# EAGLE board CT_schematic (EAGLE 7.6.0)

Size 100 x 80 mm. Coordinates in mm from the lower left corner, seen from the top.
Outline: 0,0 100,0 100,80 0,80 0,0
Copper layers (1*16): Top 0.035mm / dielectric 1.5mm / Bottom 0.035mm
Design rules "default": minimum track width 10mil, minimum drill 24mil, track to track 8mil, track to pad 8mil, pad to pad 8mil, via to via 8mil, smd to smd 8mil, copper to edge 40mil, drill to drill 8mil, minimum pad ring 10mil, minimum via ring 8mil, stop-mask expansion 4mil, vias tented up to drill 0mil, thermal gap 10mil

## Footprints (pad centres in the part's own frame; a part is rotated, then mirrored left to right if it is on the bottom)
C0603 = smd 0.8 x 0.8: 1 -0.762,0; 2 0.762,0
C0402 = smd 0.5 x 0.5: 1 -0.508,0; 2 0.508,0
C1210 = smd 1.2 x 2.5: 1 -1.524,0; 2 1.524,0
EXV-9H = smd 3.505 x 1.676: 1 -2.857,0; 2 2.857,0
L0603 = smd 0.8 x 0.8: 1 -0.762,0; 2 0.762,0
PJ-037B_PACKAGE = drill 3.7 square: 1 12,0 | drill 3.2 square: 2 6,0
R0603 = smd 0.8 x 0.8: 1 -0.762,0; 2 0.762,0
WLCSP104 = smd 0.229 x 0.229: A1 -1.6,2.2; A2 -1.2,2.2; A3 -0.8,2.2; A4 -0.4,2.2; A5 0,2.2; A6 0.4,2.2; A7 0.8,2.2; A8 1.2,2.2; A9 1.6,2.2; B1 -1.6,1.8; B2 -1.2,1.8; B3 -0.8,1.8; B4 -0.4,1.8; B5 0,1.8; B6 0.4,1.8; B7 0.8,1.8; B8 1.2,1.8; B9 1.6,1.8; C1 -1.6,1.4; C2 -1.2,1.4; C3 -0.8,1.4; C4 -0.4,1.4; C5 0,1.4; C6 0.4,1.4; C7 0.8,1.4; C8 1.2,1.4; C9 1.6,1.4; D1 -1.6,1; D2 -1.2,1; D3 -0.8,1; D4 -0.4,1; D5 0,1; D6 0.4,1; D7 0.8,1; D8 1.2,1; D9 1.6,1; E1 -1.6,0.6; E2 -1.2,0.6; E3 -0.8,0.6; E4 -0.4,0.6; E6 0.4,0.6; E7 0.8,0.6; E8 1.2,0.6; E9 1.6,0.6; F1 -1.6,0.2; F2 -1.2,0.2; F3 -0.8,0.2; F4 -0.4,0.2; F6 0.4,0.2; F7 0.8,0.2; F8 1.2,0.2; F9 1.6,0.2; G1 -1.6,-0.2; G2 -1.2,-0.2; G3 -0.8,-0.2; G4 -0.4,-0.2; G6 0.4,-0.2; G7 0.8,-0.2; G8 1.2,-0.2; G9 1.6,-0.2; H1 -1.6,-0.6; H2 -1.2,-0.6; H3 -0.8,-0.6; H4 -0.4,-0.6; H6 0.4,-0.6; H7 0.8,-0.6; H8 1.2,-0.6; H9 1.6,-0.6; J1 -1.6,-1; J2 -1.2,-1; J3 -0.8,-1; J4 -0.4,-1; J5 0,-1; J6 0.4,-1; J7 0.8,-1; J8 1.2,-1; J9 1.6,-1; K1 -1.6,-1.4; K2 -1.2,-1.4; K3 -0.8,-1.4; K4 -0.4,-1.4; K5 0,-1.4; K6 0.4,-1.4; K7 0.8,-1.4; K8 1.2,-1.4; K9 1.6,-1.4; L1 -1.6,-1.8; L2 -1.2,-1.8; L3 -0.8,-1.8; L4 -0.4,-1.8; L5 0,-1.8; L6 0.4,-1.8; L7 0.8,-1.8; L8 1.2,-1.8; L9 1.6,-1.8; M1 -1.6,-2.2; M2 -1.2,-2.2; M3 -0.8,-2.2; M4 -0.4,-2.2; M5 0,-2.2; M6 0.4,-2.2; M7 0.8,-2.2; M8 1.2,-2.2; M9 1.6,-2.2
SOIC-8 = smd 1.6 x 0.6: 1 -2.7,1.905 | smd 1.55 x 0.6: 2 -2.7,0.635; 3 -2.7,-0.635; 4 -2.7,-1.905; 5 2.7,-1.905; 6 2.7,-0.635; 7 2.7,0.635; 8 2.7,1.905
TDFN-8/6MM = smd 0.3 x 0.75: 1 0,0; 2 0.5,0; 3 1,0; 4 1.5,0; 5 1.5,3; 6 1,3; 7 0.5,3; 8 0,3
SSOP-28 = smd 1.5 x 0.4: 1 -3.625,4.225; 2 -3.625,3.575; 3 -3.625,2.925; 4 -3.625,2.275; 5 -3.625,1.625; 6 -3.625,0.975; 7 -3.625,0.325; 8 -3.625,-0.325; 9 -3.625,-0.975; 10 -3.625,-1.625; 11 -3.625,-2.275; 12 -3.625,-2.925; 13 -3.625,-3.575; 14 -3.625,-4.225; 15 3.625,-4.225; 16 3.625,-3.575; 17 3.625,-2.925; 18 3.625,-2.275; 19 3.625,-1.625; 20 3.625,-0.975; 21 3.625,-0.325; 22 3.625,0.325; 23 3.625,0.975; 24 3.625,1.625; 25 3.625,2.275; 26 3.625,2.925; 27 3.625,3.575; 28 3.625,4.225
182-009-MALE = drill 1.194 pad 1.524 octagon: 1 -5.537,10.923; 2 -2.769,10.923; 3 0,10.923; 4 2.769,10.923; 5 5.537,10.923; 6 -4.153,8.08; 7 -1.384,8.08; 8 1.384,8.08; 9 4.153,8.08 | hole 3.048: -12.446,9.501; 12.446,9.501
USB-A-H = drill 0.914: 1 2.718,3.493; 2 2.718,1.003; 3 2.718,-1.003; 4 2.718,-3.493 | drill 2.311: 5 0,-6.566; 6 0,6.566
SOT143B = smd 1 x 0.7: 1 -0.75,-1 | smd 0.6 x 0.7: 2 0.95,-1; 3 0.95,1; 4 -0.95,1
ABLS-25.000MHZ-B2F-T = smd 5.6 x 2.8: 1 -3.81,0; 2 5.69,0
ASEK = smd 1.4 x 1: 1 -1.1,-0.8; 2 1.1,-0.8; 3 1.1,0.8; 4 -1.1,0.8
WSON-8 = smd 0.3 x 0.6: 1 -0.75,0; 2 0.05,0; 3 0.85,0; 4 1.65,0; 5 1.65,3.8; 6 0.85,3.8; 7 0.05,3.8; 8 -0.75,3.8 | smd 3 x 2.6: PAD 0.45,1.9
SON-6 = smd 0.55 x 0.3: 1 -0.355,0.5 | smd 0.52 x 0.3: 2 -0.37,0; 3 -0.37,-0.5; 4 0.37,-0.5; 5 0.37,0; 6 0.37,0.5
SW_4-1437565-2 = smd 1.4 x 2.1: 1 -2.23,4.55; 2 -2.23,-4.55; 3 2.23,4.55; 4 2.23,-4.55
LGM67K-G1J2-24-Z = smd 0.8 x 1.4: A -2,0; C 0,0
NC7SZ125M5X = smd 1.3 x 0.7: 1 -1.3,0.95; 2 -1.3,0; 3 -1.3,-0.95; 4 1.3,-0.95; 5 1.3,0.95

## Placement (x,y rotation side)
C1  1e-07  [C0603]  -53.34,66.04 0 top  (outside the outline)
C2  1e-07  [C0603]  -57.15,66.04 0 top  (outside the outline)
C3  1e-07  [C0603]  -60.96,66.04 0 top  (outside the outline)
C4  1e-07  [C0603]  -64.77,66.04 0 top  (outside the outline)
C5  1e-07  [C0603]  -68.58,66.04 0 top  (outside the outline)
C6  1e-07  [C0603]  -72.39,66.04 0 top  (outside the outline)
C7  1e-07  [C0603]  -15.24,71.12 0 top  (outside the outline)
C8  4.7e-06  [C0603]  -49.53,66.04 0 top  (outside the outline)
C9  1e-07  [C0603]  -19.05,71.12 0 top  (outside the outline)
C10  1e-08  [C0603]  -22.86,71.12 0 top  (outside the outline)
C11  1e-06  [C0603]  -26.67,71.12 0 top  (outside the outline)
C12  1e-11  [C0402]  -60.96,71.12 0 top  (outside the outline)
C13  1e-11  [C0402]  -64.77,71.12 0 top  (outside the outline)
C14  1e-08  [C0402]  -68.58,71.12 0 top  (outside the outline)
C15  1e-08  [C0402]  -72.39,71.12 0 top  (outside the outline)
C16  1e-07  [C0402]  -15.24,76.2 0 top  (outside the outline)
C17  1e-07  [C0402]  -19.05,76.2 0 top  (outside the outline)
C18  1e-07  [C0402]  -22.86,76.2 0 top  (outside the outline)
C19  1e-07  [C0402]  -26.67,76.2 0 top  (outside the outline)
C20  1e-07  [C0402]  -30.48,76.2 0 top  (outside the outline)
C21  1e-08  [C0402]  -34.29,76.2 0 top  (outside the outline)
C22  1e-08  [C0402]  -38.1,76.2 0 top  (outside the outline)
C23  1e-05  [C1210]  -29.21,59.69 0 top  (outside the outline)
C24  1e-05  [C1210]  -35.56,59.69 0 top  (outside the outline)
C25  1e-07  [C0402]  -41.91,76.2 0 top  (outside the outline)
C26  0.0001  [EXV-9H]  -38.1,52.07 0 top  (outside the outline)
C27  0.0001  [EXV-9H]  -49.53,52.07 0 top  (outside the outline)
C28  1e-08  [C0402]  -45.72,76.2 0 top  (outside the outline)
F1  240.0  [L0603]  -30.48,71.12 0 top  (outside the outline)
J1  PJ-037B  [PJ-037B_PACKAGE]  -39.37,29.21 0 top  (outside the outline)
R2  1000.0  [R0603]  -34.29,71.12 0 top  (outside the outline)
R4  4700.0  [R0603]  -38.1,71.12 0 top  (outside the outline)
R5  2200.0  [R0603]  -41.91,71.12 0 top  (outside the outline)
R6  2200.0  [R0603]  -45.72,71.12 0 top  (outside the outline)
R7  10000.0  [R0603]  -67.31,58.42 0 top  (outside the outline)
R8  10000.0  [R0603]  -72.39,58.42 0 top  (outside the outline)
R9  10000.0  [R0603]  -15.24,66.04 0 top  (outside the outline)
R10  10000.0  [R0603]  -20.32,66.04 0 top  (outside the outline)
R11  10000.0  [R0603]  -25.4,66.04 0 top  (outside the outline)
R12  10000.0  [R0603]  -30.48,66.04 0 top  (outside the outline)
R13  10000.0  [R0603]  -35.56,66.04 0 top  (outside the outline)
R14  100000.0  [R0603]  -46.99,58.42 0 top  (outside the outline)
R15  100000.0  [R0603]  -52.07,58.42 0 top  (outside the outline)
R16  2231.0  [R0603]  -49.53,71.12 0 top  (outside the outline)
R17  1000.0  [R0603]  -53.34,71.12 0 top  (outside the outline)
R18  10000.0  [R0603]  -40.64,66.04 0 top  (outside the outline)
R19  10000.0  [R0603]  -45.72,66.04 0 top  (outside the outline)
R20  9100.0  [R0603]  -57.15,71.12 0 top  (outside the outline)
R21  680000.0  [R0603]  -57.15,58.42 0 top  (outside the outline)
R22  120000.0  [R0603]  -62.23,58.42 0 top  (outside the outline)
U1  STM32L151VEY6TR  [WLCSP104]  -52.07,41.91 0 top  (outside the outline)
U2  AT25020B-SSHL-T  [SOIC-8]  -24.13,43.18 0 top  (outside the outline)
U3  24AA64T-I/MNY  [TDFN-8/6MM]  -71.12,26.67 0 top  (outside the outline)
U4  ST3241EBPR  [SSOP-28]  -19.05,30.48 0 top  (outside the outline)
U5  182-009-113R531  [182-009-MALE]  -36.83,6.35 0 top  (outside the outline)
U6  61400416021  [USB-A-H]  -59.69,8.89 0 top  (outside the outline)
U7  prtr5v0u2ax  [SOT143B]  -58.42,76.2 0 top  (outside the outline)
U8  ABLS-25.000MHZ-B2F-T  [ABLS-25.000MHZ-B2F-T]  -68.58,52.07 0 top  (outside the outline)
U9  ASEK-32.768KHz-ECST  [ASEK]  -29.21,52.07 0 top  (outside the outline)
U10  LP3878SDX-ADJ/NOPB  [WSON-8]  -45.72,40.64 0 top  (outside the outline)
U11  TPS3895ADRYR  [SON-6]  -62.23,74.93 0 top  (outside the outline)
U12  4-1437565-2  [SW_4-1437565-2]  -55.88,27.94 0 top  (outside the outline)
U13  Q65110A2395  [LGM67K-G1J2-24-Z]  -17.78,59.69 0 top  (outside the outline)
U14  nc7sz125m5x  [NC7SZ125M5X]  -40.64,58.42 0 top  (outside the outline)

## Library data of the parts
C1-C28 F1 J1 R2 R4-R22 U1-U14 = circuit_tree

## Nets
CLK_CRYSTAL_U1_F8: C12.1 U1.F8 U8.1
CLK_CRYSTAL_U1_F9: C13.1 U1.F9 U8.2
CLK_U1_D8: U1.D8 U9.3
GND: C1.2 C2.2 C3.2 C4.2 C5.2 C6.2 C7.2 C8.2 C9.2 C10.2 C11.2 C12.2 C13.2 C14.2 C15.2 C16.2 C19.2 C20.2 C21.2 C22.2 C23.2 C24.2 C25.2 C26.2 C27.2 C28.2 J1.2 R2.2 R7.2 R17.2 R20.2 R22.2 U1.A1 U1.C7 U1.D2 U1.E8 U1.H8 U1.J9 U1.K8 U1.L2 U1.M1 U2.4 U3.4 U4.23 U4.25 U5.5 U6.4 U6.5 U6.6 U7.1 U9.2 U10.3 U10.PAD U11.2 U13.C U14.1 U14.3
NET_U1_A7: R7.1 U1.A7
NET_U1_B6: R6.1 U1.B6 U3.5
NET_U1_C5: R5.1 U1.C5 U3.6
NET_U1_E7: C9.1 U1.E7
NET_U1_F7: R4.1 U1.F7 U14.4
NET_U1_G6: C10.1 C11.1 F1.1 U1.G6 U1.G7
NET_U1_M7: U13.A
NET_U1_M8: U12.3 U12.4
NET_U2_3: R8.1 U2.3
NET_U2_7: R10.1 U2.7
NET_U3_1: R11.1 U3.1
NET_U3_2: R12.1 U3.2
NET_U3_3: R13.1 U3.3
NET_U4_1: C18.1 U4.1
NET_U4_2: C18.2 U4.2
NET_U4_3: C20.1 U4.3
NET_U4_22: R14.1 U4.22
NET_U4_24: C17.2 U4.24
NET_U4_27: C19.1 U4.27
NET_U4_28: C17.1 U4.28
NET_U5_2: U4.4 U5.2
NET_U5_3: U4.9 U5.3
NET_U5_7: U4.5 U5.7
NET_U5_8: U4.10 U5.8
NET_U7_4: U6.1 U7.4
NET_U10_1: C22.1 U10.1
NET_U10_6: R16.2 R17.1 U10.6
NET_U10_8: R15.1 U10.8
NET_U11_1: R19.1 R20.1 U11.1
NET_U11_3: R21.2 R22.1 U11.3
NET_U11_4: R18.1 U11.4 U14.2
NET_U12_1: R2.1 U12.1 U12.2
PROC_SPI1_MISO: U1.A5 U2.2
PROC_SPI1_MOSI: U1.A6 U2.5
PROC_SPI1_NSS: R9.1 U1.B1 U2.1
PROC_SPI1_SCK: U1.B5 U2.6
PROC_UART4_RX: U1.C2 U4.19
PROC_UART4_TX: U1.E4 U4.14
PROC_USB_DM: U1.E1 U6.2 U7.3
PROC_USB_DP: U1.E2 U6.3 U7.2
VCC_S1_15V3: C23.1 C26.1 C27.1 J1.1 R15.2 U10.4
VCC_TIER1_3V3: C1.1 C2.1 C3.1 C4.1 C5.1 C6.1 C7.1 C8.1 C14.1 C15.1 C16.1 C21.1 C24.1 C25.1 C28.1 F1.2 R4.2 R5.2 R6.2 R8.2 R9.2 R10.2 R11.2 R12.2 R13.2 R14.2 R16.1 R18.2 R19.2 R21.1 U1.A9 U1.B8 U1.C1 U1.E9 U1.K3 U1.L8 U1.M9 U2.8 U3.7 U3.8 U4.26 U9.4 U10.5 U11.6 U14.5

## Tracks (layer width: path | path; a pad name or v marks a point on that pad's centre or on a via)
CLK_CRYSTAL_U1_F8  (2 unrouted)
CLK_CRYSTAL_U1_F9  (2 unrouted)
CLK_U1_D8  (1 unrouted)
GND  (56 unrouted)
NET_U1_A7  (1 unrouted)
NET_U1_B6  (2 unrouted)
NET_U1_C5  (2 unrouted)
NET_U1_E7  (1 unrouted)
NET_U1_F7  (2 unrouted)
NET_U1_G6  (4 unrouted)
NET_U1_M8  (1 unrouted)
NET_U2_3  (1 unrouted)
NET_U2_7  (1 unrouted)
NET_U3_1  (1 unrouted)
NET_U3_2  (1 unrouted)
NET_U3_3  (1 unrouted)
NET_U4_1  (1 unrouted)
NET_U4_2  (1 unrouted)
NET_U4_3  (1 unrouted)
NET_U4_22  (1 unrouted)
NET_U4_24  (1 unrouted)
NET_U4_27  (1 unrouted)
NET_U4_28  (1 unrouted)
NET_U5_2  (1 unrouted)
NET_U5_3  (1 unrouted)
NET_U5_7  (1 unrouted)
NET_U5_8  (1 unrouted)
NET_U7_4  (1 unrouted)
NET_U10_1  (1 unrouted)
NET_U10_6  (2 unrouted)
NET_U10_8  (1 unrouted)
NET_U11_1  (2 unrouted)
NET_U11_3  (2 unrouted)
NET_U11_4  (2 unrouted)
NET_U12_1  (2 unrouted)
PROC_SPI1_MISO  (1 unrouted)
PROC_SPI1_MOSI  (1 unrouted)
PROC_SPI1_NSS  (2 unrouted)
PROC_SPI1_SCK  (1 unrouted)
PROC_UART4_RX  (1 unrouted)
PROC_UART4_TX  (1 unrouted)
PROC_USB_DM  (2 unrouted)
PROC_USB_DP  (2 unrouted)
VCC_S1_15V3  (5 unrouted)
VCC_TIER1_3V3  (44 unrouted)